# Altium PCB power2.PcbDoc
Units mm, origin at the board's own origin, x right, y up, seen from the top; angles counter-clockwise.
Board outline 71.63 x 33.66 mm, 2 copper layers (Top Layer, Bottom Layer); 7 components, 3 nets, 21 pads, 0 vias.
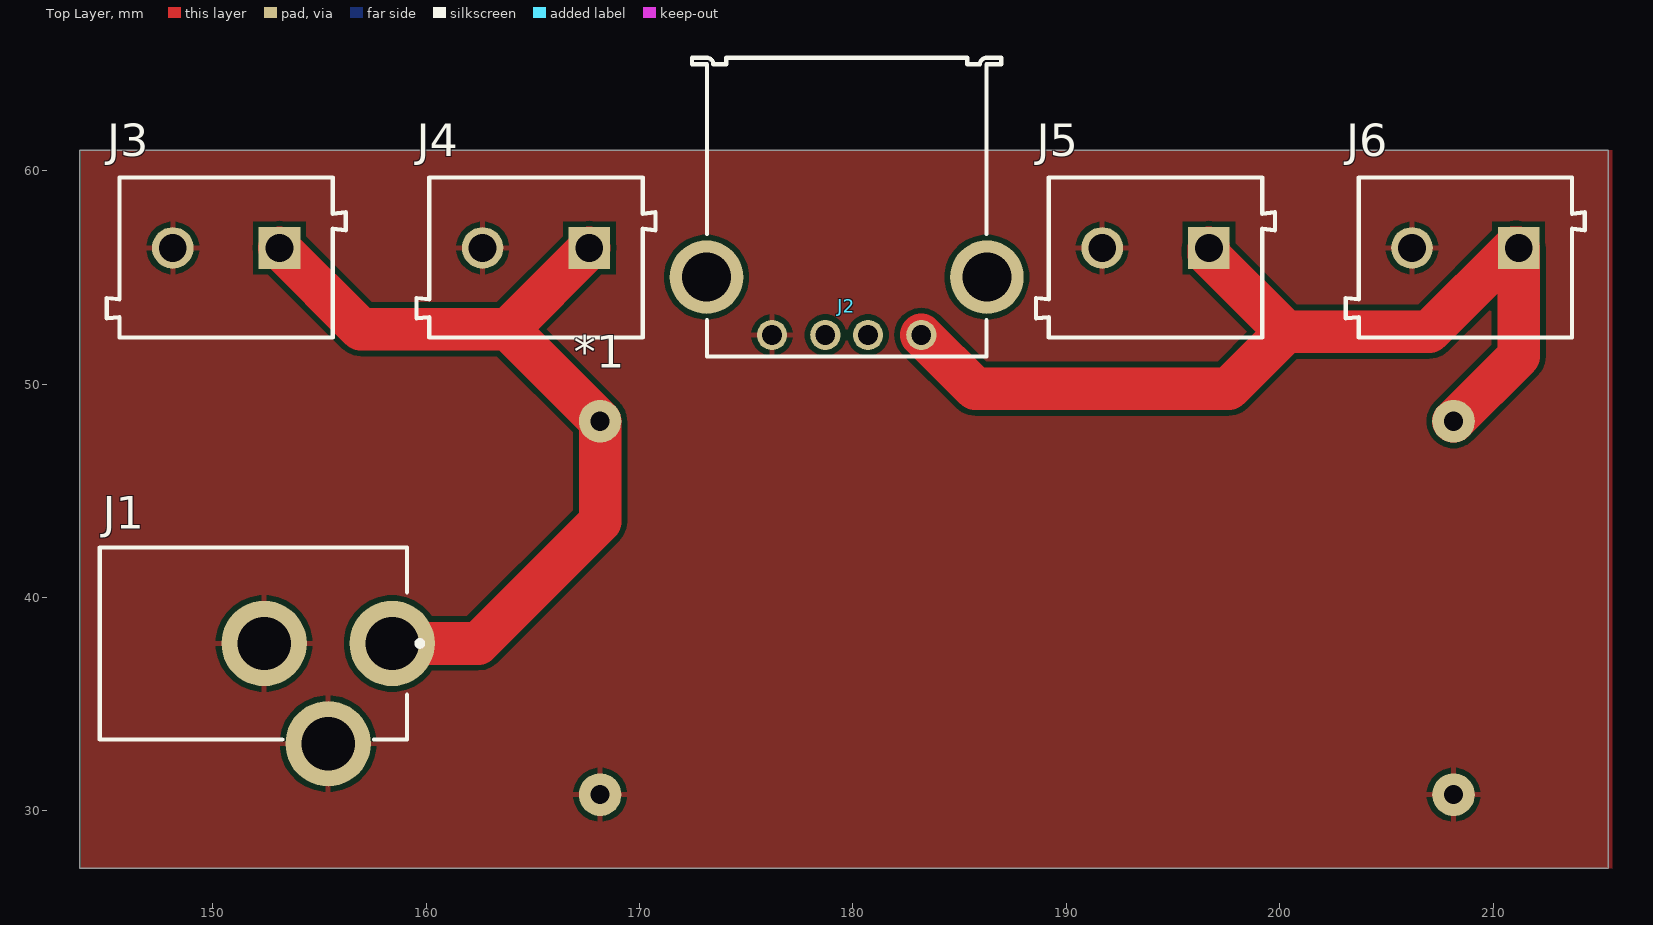
[diagram p0: Top Layer view]
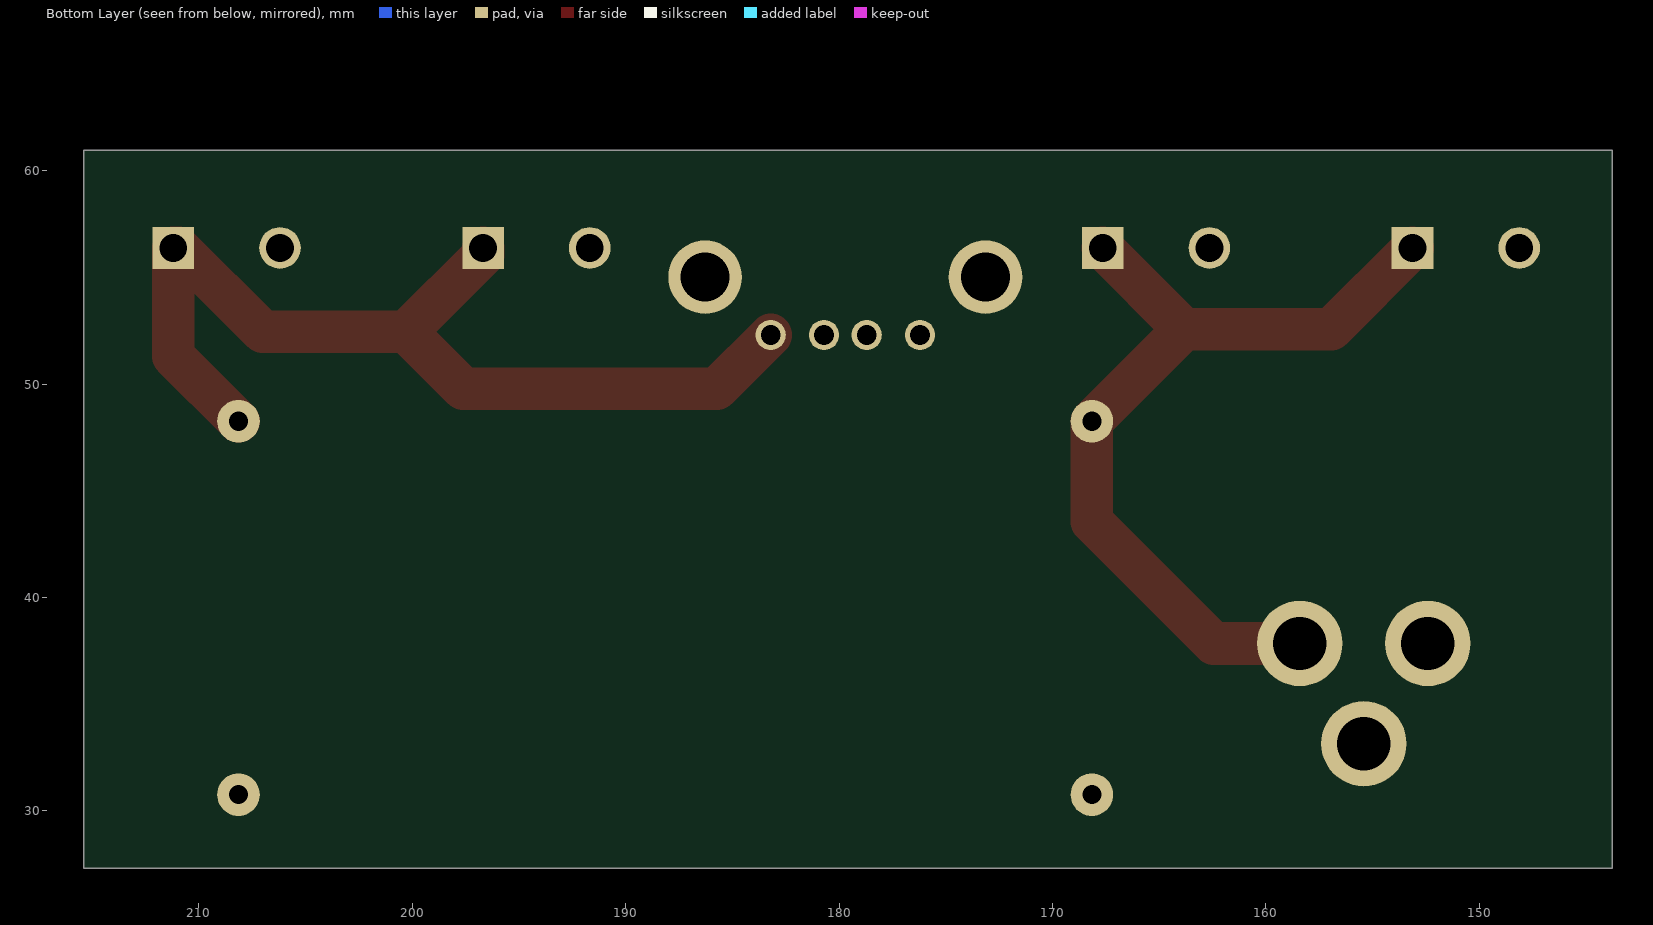
[diagram p1: Bottom Layer view, seen from below]
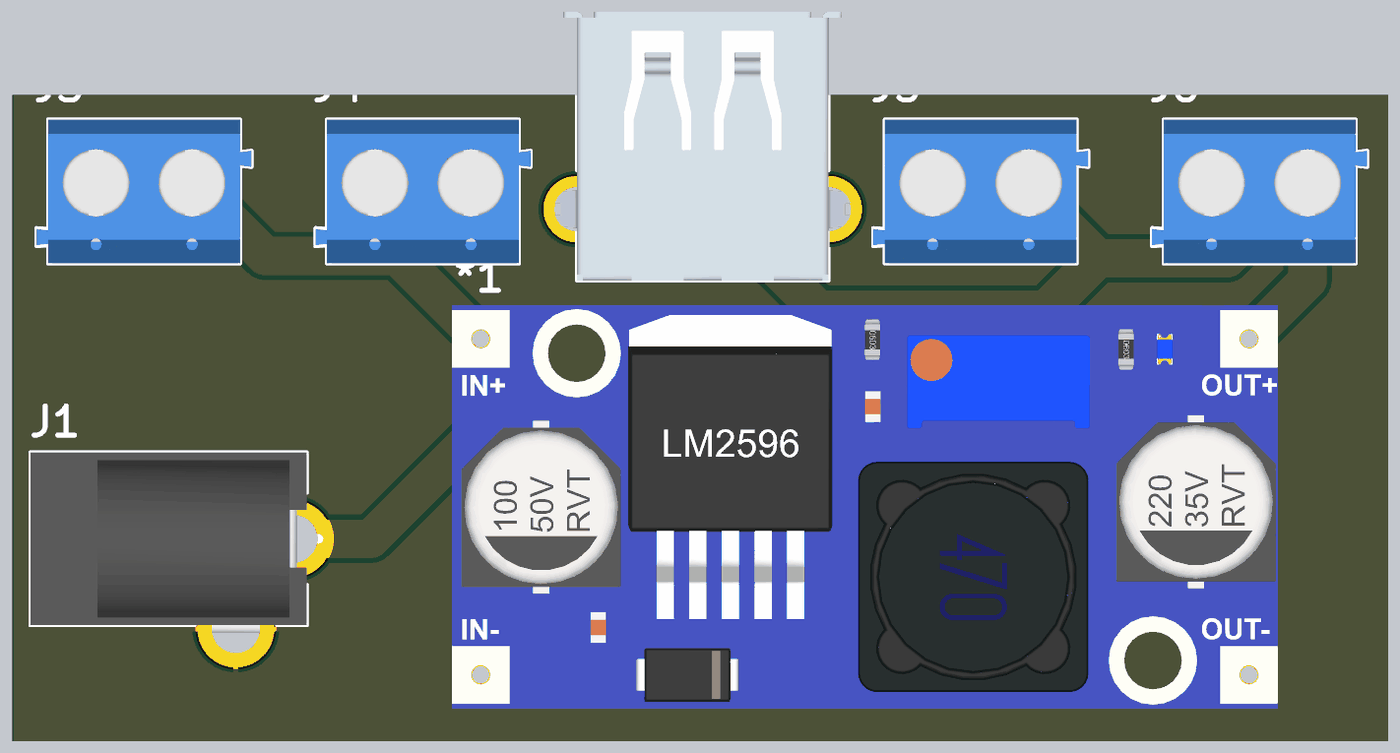
[diagram p2: 3D render of the assembled board from above, using the file's embedded part models]

## Layer stack, top to bottom
Top Solder: solder mask 0.0102, Solder Resist, Dk 3.5
Top Layer: signal copper 0.0356
Dielectric 1: dielectric 0.32, FR-4, Dk 4.8
Bottom Layer: signal copper 0.0356
Bottom Solder: solder mask 0.0102, Solder Resist, Dk 3.5

## Board outline
143.764,27.305 215.392,27.305 215.392,60.96 143.764,60.96

## Design rules (kind name [scope] priority, off if disabled: settings)
Clearance [All] p1: gap=0.254 ignorepadtopadclearanceinfootprint=FALSE except(0: Arc-Hole Track-Hole SMDPad-Hole THPad-Hole Via-Hole Fill-Hole Poly-Hole Region-Hole Text-Hole)
PolygonConnect [All] p1: connectstyle=Relief reliefconductorwidth=0.254 reliefentries=4 polygonreliefangle="90 Angle" airgapwidth=0.254
RoutingVias [All] p1: holewidth=0.711 width=1.27 viastyle="Through Hole" minholewidth=0.711 minwidth=1.27 maxholewidth=0.711 maxwidth=1.27
SolderMaskExpansion [All] p1: expansion=0.102 istentingtop=FALSE
Width [All] p1: maxlimit=0.254 minlimit=0.254 preferedwidth=0.254
30 further rules are at their usual default settings.

## Components (designator, comment, footprint, x,y, rotation, side; value= is the part's Value field where it differs from the comment)
*1 "LM2596" regulador 186.944,39.243 r0 top
J1 "PJ-002A" CUI-PJ-002A_V 155.4,37.846 r180 top
J2 "61400416021" 61400416021 179.705,58.293 r180 top
J3 "691102710002" 691102710002 150.622,55.932 r180 top
J4 "691102710002" 691102710002 165.142,55.932 r180 top
J5 "691102710002" 691102710002 194.181,55.932 r180 top
J6 "691102710002" 691102710002 208.701,55.932 r180 top

## Footprints (in the part's own frame and the unit in brackets; to place one, negate y for a bottom-side part, rotate by r counter-clockwise, add the part's x,y. Pads: shape width x height; smd on the part's side, far side on the other; paste and mask are expansions set on the pad)
61400416021 [mm] "USB 2.0 Type A Horizontal"
  round 1.42 hole 0.92: 1(-3.5,5.99) 2(-1,5.99) 3(1,5.99) 4(3.5,5.99)
  round 3.45 hole 2.3: Shell(-6.57,3.28) Shell(6.57,3.28)
  silkscreen extent -7.25,-7 7.25,7, body extent -8,-7 8,7, height 7.63
691102710002 [mm] "5,00mm - modular - blue - Horizontal entry with pressure clamp - 9,9 mm height - 02p"
  rect 1.95x1.95 hole 1.3: 1(-2.5,-0.45)
  round 1.95 hole 1.3: 2(2.5,-0.45)
  silkscreen extent -5.6,-3.75 5.6,3.75, body extent -5.6,-3.75 5.6,3.75, height 9.96
CUI-PJ-002A_V [mm] "THD, 3-Leads, Body 14.4x9mm, Height 11mm"
  round 4 hole 2.5: 1(-3,0) 2(3,0) 3(0,4.7)
  silkscreen extent -4.43,-4.5 10.7,4.5, body extent -3.7,-4.5 10.7,4.9, height 11
regulador [mm]
  round 2 hole 0.9: 1(-18.796,9.017) 2(-18.796,-8.483) 3(21.204,9.017) 4(21.204,-8.483)
  body extent -20.3,-10.23 22.7,10.77, height 13.16

## Part data
*1: library part regulador, "LM2596 DC-DC"
J1: library part CMP-2000-06895-2, "Through Hole Right Angle DC Power Jack, 2.5 A, 2 mm Center Pin, 3 Position, -25 to 85 degC, RoHS, Bulk", Current Rating=2.5A, Flammability Rating=UL94V-0, Insulation Resistance=50MOhms, Manufacturer=CUIInc., Operating Temperature Range=-25Cto+85C, Package Description="3-Pin Through Hole Device, Body 14.4 x 9 mm, Height 11 mm", Voltage Rating=24V, Brand=CUI, Connector Type=DCPowerJack, Contact Gender=Male, Contact Material=Copper, Contact Plating=Nickel, Datasheet URL=http://www.cui.com/product/resource/pj-002a.pdf, Datasheet Version="Rev. 1.03, 04/2016", Factory Pack Quantity=500, Housing Material=PolybutyleneTerephthalate(PBT), Inside Contact Diameter=2mm, Manufacturer URL=http://www.cui.com/, Mounting Angle=Right, Mounting Style=ThroughHole, Mounting Technology=ThroughHole, Outside Contact Diameter=6.5mm, Package Reference=PJ-002A, Product=Jacks, Product Category=DCPowerConnectors, RoHS=True, Termination Style=ThroughHole
J2: library part CMP-1502-03227-1, "USB 2.0 Type A Receptacle WR-COM, Horizontal, THT", Contact Resistance=20mOhm, Manufacturer="Wurth Elektronik", Operating temperature=-40to105degC, Rated Current=1.5A, Working Voltage=30VAC, Connector Type=USB2.0TypeA, Datasheet URL=https://katalog.we-online.de/em/datasheet/61400416021.pdf, Gender=Receptacle, Manufacturer URL=http://www.we-online.de, Mounting Technology=THT, Orientation=Horizontal, Package Reference=61400416021, Packaging=Tray, Part Number=61400416021, Publisher=WurthElektronik
J3 J4 J5 J6: library part CMP-1502-03258-1, "Series 102 - 5.00 mm Horizontal Entry Modular with Pressure Clamp WR-TBL, 2 pin", Manufacturer="Wurth Elektronik", Operating temperature=-40to105degC, Datasheet URL=http://katalog.we-online.de/em/datasheet/6911027100xx.pdf, Manufacturer URL=http://www.we-online.de, Mounting Technology=THT, Package Reference=691102710002, Packaging=Box, Part Number=691102710002, Pin Number=2, Pitch=5.00mm, Publisher=WurthElektronik

## Nets (pads, with @x,y where several pads share a name; then routed paths per layer and width w, separated by ;. In a path a pad name is that pad's centre, name@x,y a point inside that pad or via, vN(x,y) a via of type N, cw(c..) or ccw(c..) an arc to the next point about the centre after c; other vN are vias at no path point)
+5: *1.3 J2.1 J5.1 J6.1 | length 46.6
  Top Layer w2: J2.1 185.724,49.784 197.612,49.784 200.279,52.451 ; J5.1 196.681,56.049 200.279,52.451 ; *1.3 211.201,51.313 J6.1 210.941,56.382 207.01,52.451 200.279,52.451
+12: *1.1 J1.1 J3.1 J4.1 | length 40.6
  Top Layer w0.254: 163.838,52.57 163.838,52.578
  Top Layer w2: J3.1 156.926,52.578 163.838,52.578 J4.1 ; J1.1 162.433,37.846 168.148,43.561 *1.1 163.838,52.57
GND: *1.2 *1.4 J1.2 J1.3 J2.4 J3.2 J4.2 J5.2 J6.2
pads on no net: J2.2 J2.3 J2.Shell

## Polygon pours and split planes (outlines as drawn)
GND on Top Layer "GND_L01_P000" (solid, pour order 0): 143.827,60.96 215.582,60.96 215.582,27.305 143.827,27.305

## Text inside footprints (layer, text, board x,y; h text height)
J2: Top 3D Body "PCB Edge" at 181.905,66.513 h0.81 r180